# Altium PCB industrial_stepper_driver.PcbDoc
Units mm, origin at the board's own origin, x right, y up, seen from the top; angles counter-clockwise.
Board outline 32.8 x 86.9 mm, 4 copper layers (Top Layer, GND, POWER, Bottom Layer), stack 1.556 mm thick; 104 components, 68 nets, 352 pads, 72 vias.
Unrouted connection lines stored in the file: 161.
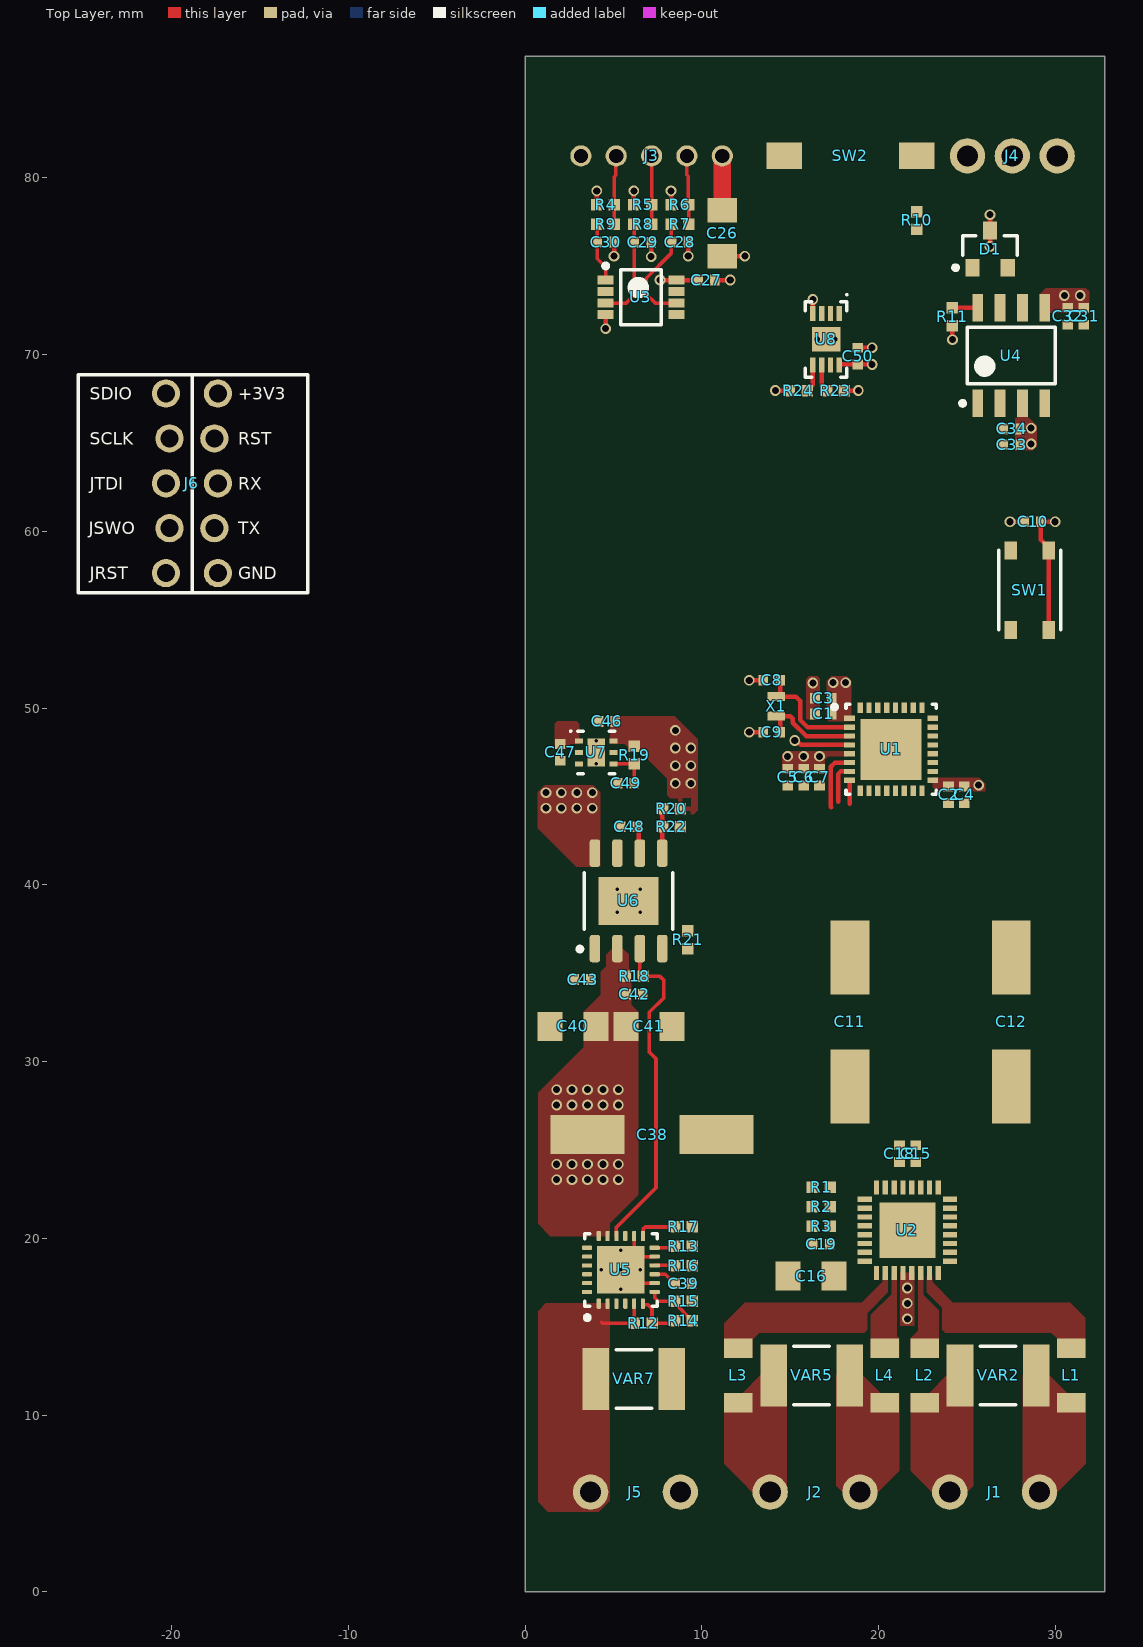
[diagram p0: Top Layer view]
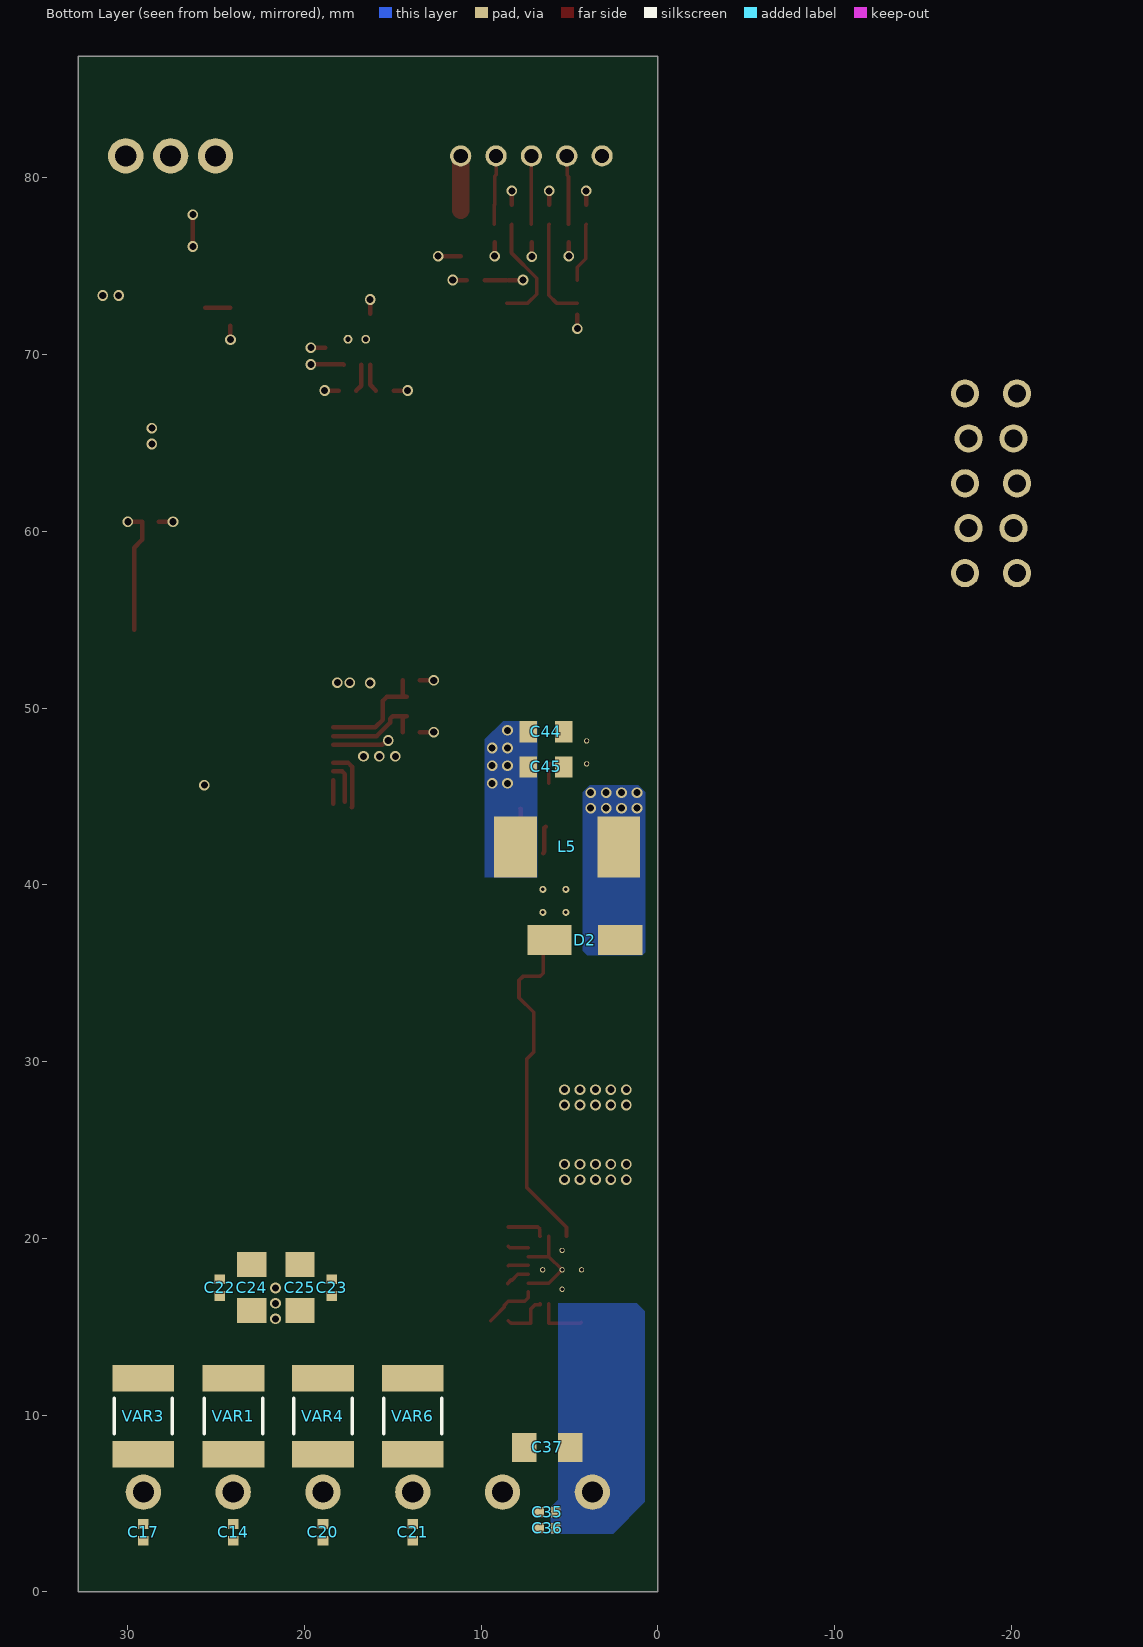
[diagram p1: Bottom Layer view, seen from below]
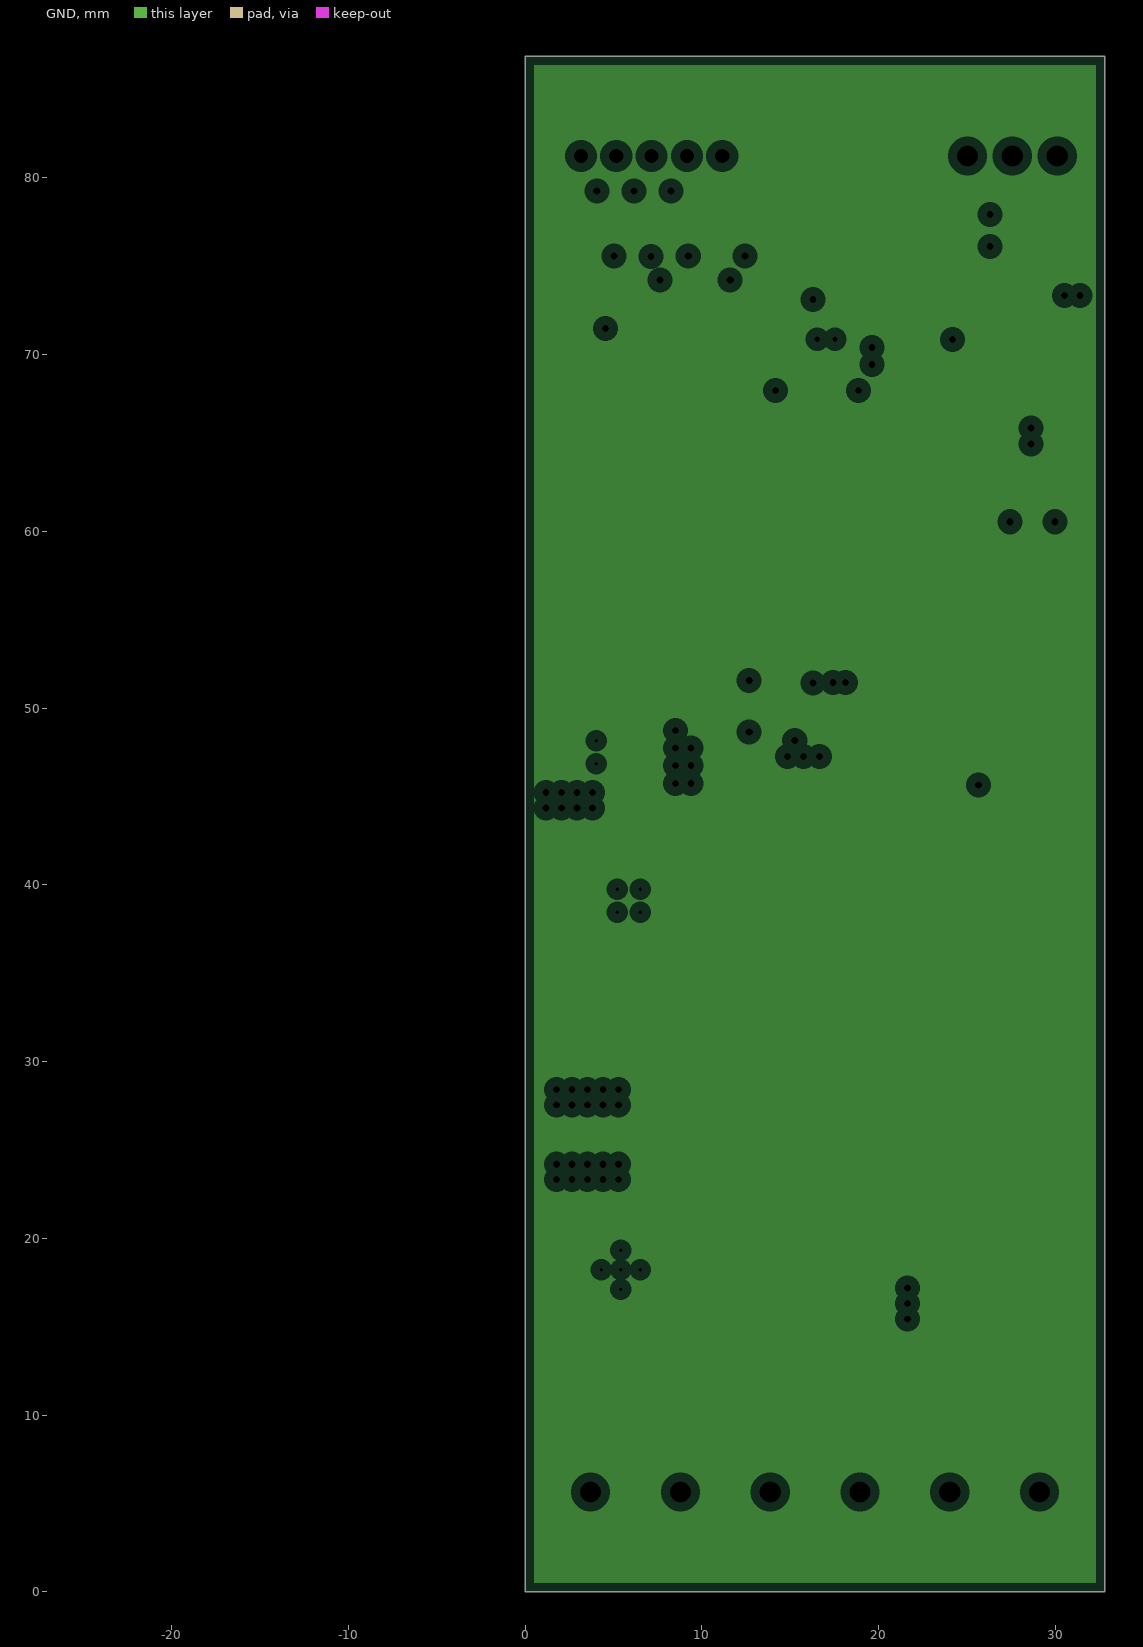
[diagram p2: GND, clearances drawn from the general rule]
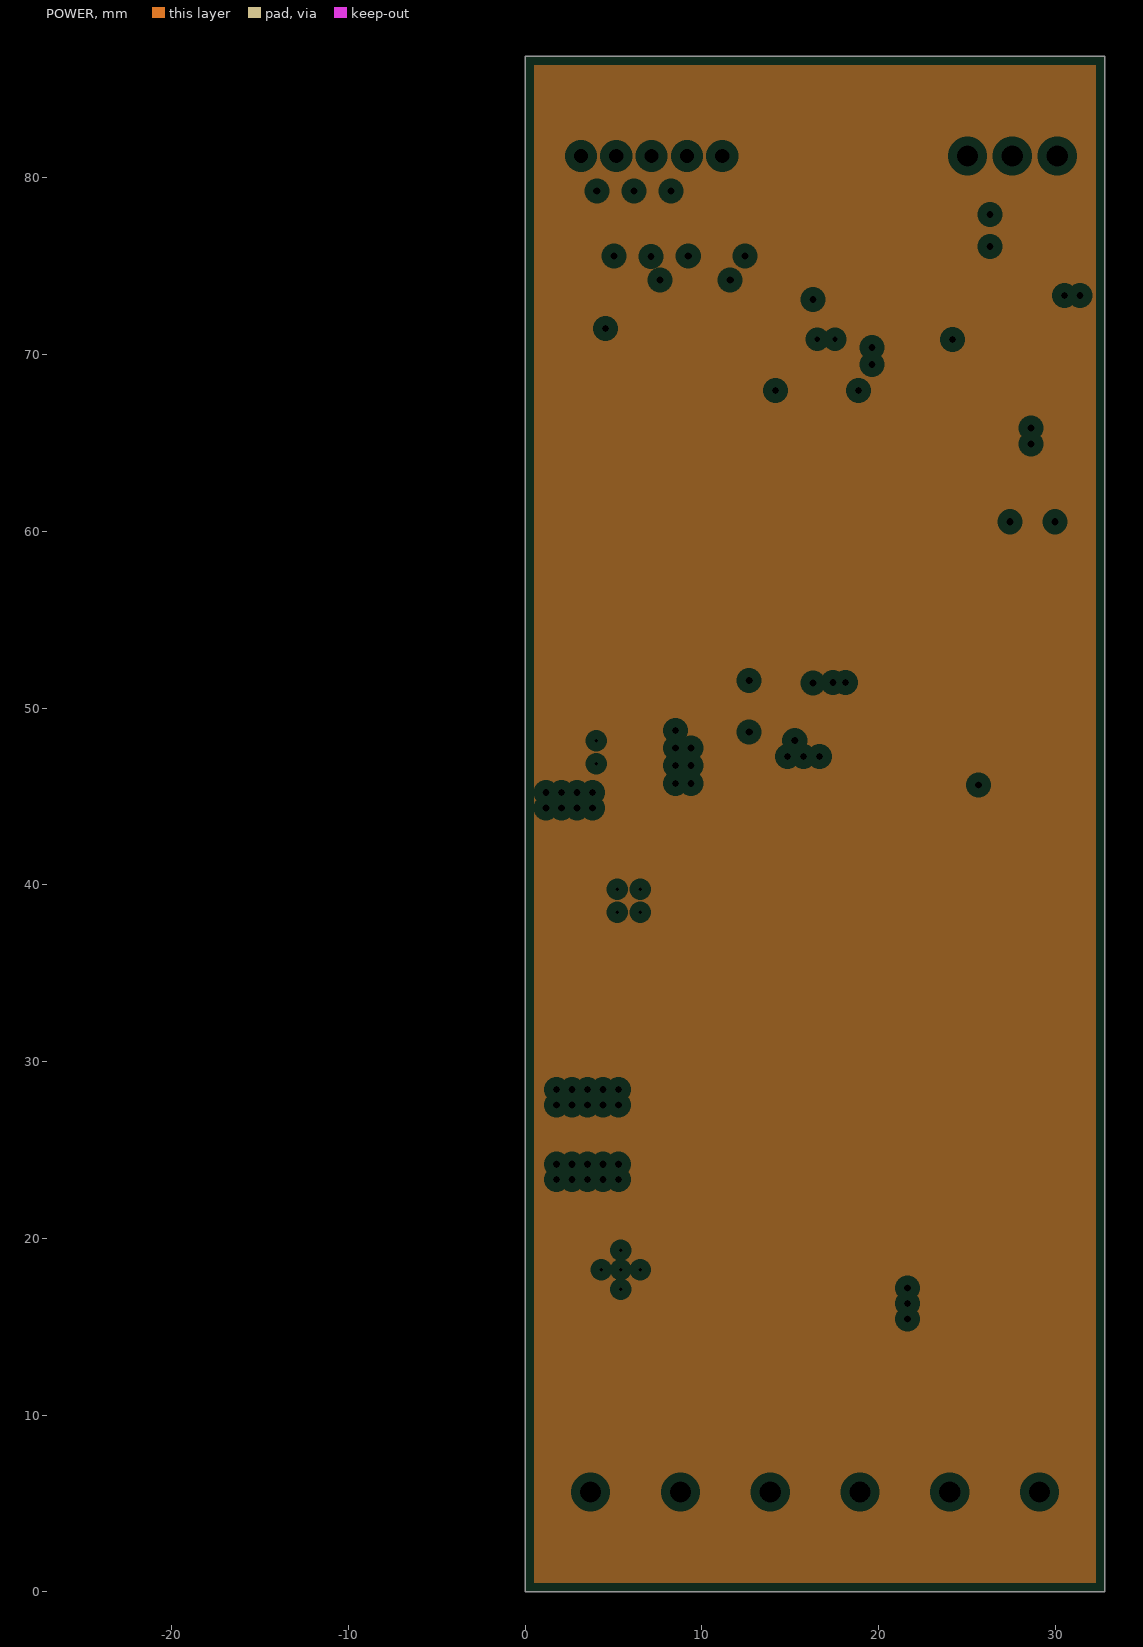
[diagram p3: POWER, clearances drawn from the general rule]

## Layer stack, top to bottom
Top Solder: solder mask 0.025, Solder Resist, Dk 3.5
Top Layer: signal copper 0.04
Dielectric 4: prepreg 0.069, PP-006, Dk 4.1
Dielectric 2: prepreg 0.069, PP-006, Dk 4.1
GND: plane copper 0.035
Dielectric 1: core 1.13, FR-4, Dk 4.8
POWER: plane copper 0.035
Dielectric 3: prepreg 0.069, PP-006, Dk 4.1
Dielectric 5: prepreg 0.069, PP-006, Dk 4.1
Bottom Layer: signal copper 0.04
Bottom Solder: solder mask 0.025, Solder Resist, Dk 3.5

## Board outline
0,0 32.8,0 32.8,86.9 0,86.9

## Design rules (kind name [scope] priority, off if disabled: settings)
Clearance [All] p1: gap=0.15 ignorepadtopadclearanceinfootprint=FALSE except(0.2: Fill-Fill Fill-Poly Fill-Region Poly-Poly Poly-Region Region-Region)
PlaneClearance [All] p1: clearance=0.508
PlaneConnect [All] p1: planeconnectstyle=Relief reliefexpansion=0.508 reliefentries=4 reliefconductorwidth=0.254 reliefairgap=0.254
PolygonConnect [All] p1: connectstyle=Relief reliefconductorwidth=0.254 reliefentries=4 polygonreliefangle="90 Angle" airgapwidth=0.254
RoutingVias [All] p1: holewidth=0.711 width=1.27 viastyle="Through Hole" minholewidth=0.711 minwidth=1.27 maxholewidth=0.711 maxwidth=1.27
SolderMaskExpansion [All] p1: expansion=0.102 istentingtop=FALSE
Width [All] p1: maxlimit=5 minlimit=0.125 preferedwidth=0.254
28 further rules are at their usual default settings.

## Classes and differential pairs
component class "06 POWER": C35 C36 C37 C38 C39 C40 C41 C42 C43 C44 C45 C46 C47 C48 C49 D2 J5 L5 R12 R13 R14 R15 R16 R17 R18 R19 R20 R21 R22 U5 U6 U7 VAR7
component class "05 COMMUNICATION": C31 C32 C33 C34 C50 D1 J4 R10 R11 R23 R24 SW2 U4 U8
component class "04 DRIVER": C11 C12 C14 C15 C16 C17 C18 C19 C20 C21 C22 C23 C24 C25 C26 C27 C28 C29 C30 J1 J2 J3 L1 L2 L3 L4 R1 R2 R3 R4 R5 R6 R7 R8 R9 U2 U3 VAR1 VAR2 VAR3 VAR4 VAR5 VAR6
component class "03 MCU": C1 C2 C3 C4 C5 C6 C7 C8 C9 C10 J6 SW1 U1 X1

## Components (designator, comment, footprint, x,y, rotation, side; value= is the part's Value field where it differs from the comment)
C1 "100nF/50V" CAPC1005X06M-0402 16.875,49.675 r0 top
C2 "100nF/50V" CAPC1005X06M-0402 23.95,45.1 r90 top
C3 "2.2uF/6.3V" CAPC1005X06M-0402 16.875,50.575 r0 top
C4 "2.2uF/6.3V" CAPC1005X06M-0402 24.85,45.1 r90 top
C5 "1uF/6.3V" CAPC1005X06M-0402 14.85,46.1 r90 top
C6 "22nF/50V" CAPC1005X06M-0402 15.75,46.1 r90 top
C7 "100nF/50V" CAPC1005X06M-0402 16.65,46.1 r90 top
C8 "22pF/50V" CAPC1005X06M-0402 13.95,51.575 r0 top
C9 "22pF/50V" CAPC1005X06M-0402 13.95,48.65 r0 top
C10 "100nF/50V" CAPC1005X06M-0402 28.704,60.55 r0 top
C11 "100uF/50V" A768KS107M1HLAE030 18.375,32.25 r90 top
C12 "100uF/50V" A768KS107M1HLAE030 27.5,32.25 r90 top
C14 "470pF/50V" CAPC1005X06M-0402 24.01,3.375 r90 bottom
C15 "2.2uF/6.3V" CAPC1005X06M-0402 22.1,24.8 r270 top
C16 "1uF/100V" CAPC2012X14M 16.175,17.875 r0 top
C17 "470pF/50V" CAPC1005X06M-0402 29.11,3.375 r270 bottom
C18 "100nF/50V" CAPC1005X06M-0402 21.175,24.8 r270 top
C19 "22nF/50V" CAPC1005X06M-0402 16.75,19.675 r0 top
C20 "470pF/50V" CAPC1005X06M-0402 18.94,3.375 r90 bottom
C21 "470pF/50V" CAPC1005X06M-0402 13.865,3.375 r270 bottom
C22 "100nF/50V" CAPC1005X06M-0402 24.775,17.225 r270 bottom
C23 "100nF/50V" CAPC1005X06M-0402 18.45,17.225 r270 bottom
C24 "1uF/100V" CAPC2012X14M 22.975,17.225 r270 bottom
C25 "1uF/100V" CAPC2012X14M 20.25,17.225 r270 bottom
C26 "1uF/100V" CAPC2012X14M 11.15,76.875 r90 top
C27 "100nF/50V" CAPC1005X06M-0402 10.25,74.225 r0 top
C28 "15pF/50V" CAPC1005X06M-0402 8.75,76.375 r180 top
C29 "15pF/50V" CAPC1005X06M-0402 6.65,76.35 r180 top
C30 "15pF/50V" CAPC1005X06M-0402 4.55,76.375 r180 top
C31 "100nF/50V" CAPC1005X06M-0402 31.6,72.175 r90 top
C32 "2.2uF/6.3V" CAPC1005X06M-0402 30.7,72.175 r90 top
C33 "100nF/50V" CAPC1005X06M-0402 27.525,64.9 r0 top
C34 "2.2uF/6.3V" CAPC1005X06M-0402 27.525,65.8 r0 top
C35 "22nF/50V" CAPC1005X06M-0402 6.25,4.5 r180 bottom
C36 "100nF/50V" CAPC1005X06M-0402 6.25,3.601 r180 bottom
C37 "1uF/100V" CAPC2012X14M 6.25,8.175 r180 bottom
C38 "100uF/50V" A768KS107M1HLAE030 7.175,25.875 r0 top
C39 "22nF/50V" CAPC1005X06M-0402 8.95,17.45 r180 top
C40 "4.7uF/50V" CAPC2012X14M 2.7,32 r0 top
C41 "4.7uF/50V" CAPC2012X14M 7,32 r180 top
C42 "100nF/50V" CAPC1005X06M-0402 6.175,33.825 r180 top
C43 "100nF/50V" CAPC1005X06M-0402 3.25,34.65 r0 top
C44 "47uF/6.3V" CAPC1608X10M-0603 6.325,48.675 r0 bottom
C45 "47uF/6.3V" CAPC1608X10M-0603 6.325,46.675 r0 bottom
C46 "1uF/6.3V" CAPC1005X06M-0402 4.625,49.25 r0 top
C47 "1uF/6.3V" CAPC1005X06M-0402 1.975,47.5 r90 top
C48 "22nF/50V" CAPC1005X06M-0402 5.875,43.3 r180 top
C49 "100nF/50V" CAPC1005X06M-0402 5.7,45.75 r0 top
C50 "100nF/50V" CAPC1005X06M-0402 18.825,69.925 r270 top
D1 "RESD1CANYT116" SOT100P240X115-3N 26.3,75.975 r90 top
D2 "B350A-13-F" SMA 4.125,36.875 r0 bottom
J1 "2POS 5.08MM" 282837-2 29.1,5.65 r180 top
J2 "2POS 5.08MM" 282837-2 18.94,5.65 r180 top
J3 "5POS 2MM" B5B-PH-K-S 7.15,81.25 r180 top locked
J4 "3POS 2.54MM" 282834-3 25.02,81.25 r0 top locked
J5 "2POS 5.08MM" 282837-2 8.78,5.65 r180 top locked
J6 "CONN_PROG" CONN_PROG -17.585,67.805 r270 top
L1 "50/100MHz" INDC3200X110-1206 30.9,12.25 r270 top
L2 "50/100MHz" INDC3200X110-1206 22.6,12.25 r270 top
L3 "50/100MHz" INDC3200X110-1206 12.05,12.25 r270 top
L4 "50/100MHz" INDC3200X110-1206 20.35,12.25 r270 top
L5 "5.6uH/5.3A" IHLP2525CZER5R6M8A 5.125,42.15 r0 bottom
R1 "100k/1%" RESC1005X04M-0402 16.75,22.9 r180 top
R2 "100k/1%" RESC1005X04M-0402 16.75,21.8 r180 top
R3 "100k/1%" RESC1005X04M-0402 16.75,20.7 r180 top
R4 "4.7k/1%" RESC1005X04M-0402 4.55,78.475 r180 top
R5 "4.7k/1%" RESC1005X04M-0402 6.65,78.475 r180 top
R6 "4.7k/1%" RESC1005X04M-0402 8.75,78.475 r180 top
R7 "1k/1%" RESC1005X04M-0402 8.75,77.375 r180 top
R8 "1k/1%" RESC1005X04M-0402 6.65,77.375 r180 top
R9 "1k/1%" RESC1005X04M-0402 4.55,77.375 r180 top
R10 "120/1%" RESC1005X04M-0402 22.15,77.6 r90 top
R11 "100k/1%" RESC1005X04M-0402 24.175,72.15 r90 top
R12 "866k/1%" RESC1005X04M-0402 6.675,15.2 r180 top
R13 "100k/1%" RESC1005X04M-0402 8.95,19.55 r180 top
R14 "78.7k/1%" RESC1005X04M-0402 8.95,15.35 r180 top
R15 "32.4k/1%" RESC1005X04M-0402 8.95,16.45 r180 top
R16 "3k/1%" RESC1005X04M-0402 8.95,18.45 r180 top
R17 "18.7k/1%" RESC1005X04M-0402 8.95,20.65 r180 top
R18 "100k/1%" RESC1005X04M-0402 6.175,34.825 r0 top
R19 "100k/1%" RESC1005X04M-0402 6.175,47.35 r90 top
R20 "100k/1%" RESC1005X04M-0402 8.275,44.325 r0 top
R21 "32.4k/1%" RESC1005X04M-0402 9.2,36.9 r270 top
R22 "17.4k/1%" RESC1005X04M-0402 8.275,43.3 r180 top
R23 "4.7k/1%" RESC1005X04M-0402 17.55,67.975 r0 top
R24 "4.7k/1%" RESC1005X04M-0402 15.45,67.975 r180 top
SW1 "Switch SPST-NO" "PTS815 SJM 250 SMTR LFS" 28.552,56.678 r90 top
SW2 "SDA01H1SBD" SDA01H1SB 18.4,81.25 r0 top locked
U1 "STM32L432KCU6" PQFN50P500X500X60_HS-33N 20.7,47.675 r0 top
U2 "TMC2240ATJ+" TQFN32-5mmx5mm 21.625,20.465 r270 top
U3 "74LVC3G17DP,125" TSOP65P400X110-8N 6.55,73.25 r0 top
U4 "TCAN1051VDRQ1" SOIC127P600X175-8N 27.5,69.95 r90 top
U5 "TPS16630RGET" PQFN50P400X400X100_HS-25N 5.412,18.225 r90 top
U6 "LMR14020SDDAR" SOIC127P600X170_HS-9N 5.85,39.1 r90 top
U7 "TLV75533PDRVR" SON65P200X80_HS-7N 4.025,47.5 r0 top
U8 "ATECC608A-MAHDA-S" SON50P200X60_HS-9N 17.025,70.875 r270 top
VAR1 "68V/600A" VARA4732X16N 24.01,9.95 r90 bottom
VAR2 "68V/600A" VARA4732X16N 26.75,12.25 r0 top
VAR3 "68V/600A" VARA4732X16N 29.11,9.95 r270 bottom
VAR4 "68V/600A" VARA4732X16N 18.94,9.95 r90 bottom
VAR5 "68V/600A" VARA4732X16N 16.2,12.25 r180 top
VAR6 "68V/600A" VARA4732X16N 13.865,9.95 r270 bottom
VAR7 "68V/600A" VARA4732X16N 6.15,12.05 r180 top
X1 "32.7680KHZ" 2-SMD 14.198,50.105 r90 top

## Footprints (in the part's own frame and the unit in brackets; to place one, negate y for a bottom-side part, rotate by r counter-clockwise, add the part's x,y. Pads: shape width x height; smd on the part's side, far side on the other; paste and mask are expansions set on the pad)
2-SMD [mm]
  rect 0.5x1 smd mask+0.1: 1(-0.55,0) 2(0.55,0)
  body extent -0.8,-0.5 0.8,0.5, height 0.51
282834-3 [mm]
  round 2 hole 1.2: 1(0,0) 2(2.54,0) 3(5.08,0)
  body extent -1.5,-3.25 6.58,3.25, height 10.01
282837-2 [mm]
  round 2 hole 1.2: 1(0,0) 2(5.08,0)
  body extent -2.53,-4.07 8.23,4.13, height 10.01
A768KS107M1HLAE030 [mm] "A768KS107M1HLAE030"
  rect 4.2x2.2 smd: 1(-3.65,0) 2(3.65,0)
  body extent -4.6,-4.25 4.6,4.25, height 12.52
B5B-PH-K-S [mm] "B5B-PH-K-S"
  round 1.2 hole 0.8: 1(-4,0) 2(-2,0) 3(0,0) 4(2,0) 5(4,0)
  body extent -5.95,-2.8 5.95,1.7, height 6.01
CAPC1005X06M-0402 [mm] "Chip Capacitor, 2-Leads, Body 1.00x0.50mm, IPC Low Density"
  rect 0.55x0.6 smd: 1(-0.475,0) 2(0.475,0)
  body extent -0.55,-0.3 0.55,0.3, height 0.6
CAPC1608X10M-0603 [mm] "Chip Capacitor, 2-Leads, Body 1.60x0.80mm, IPC Low Density"
  rect 1x1.2 smd: 1(-1,0) 2(1,0)
  body extent -0.9,-0.5 0.9,0.5, height 1
CAPC2012X14M [mm] "Chip Capacitor, 2-Leads, Body 2.00x1.25mm, IPC Low Density"
  rect 1.4x1.65 smd: 1(-1.3,0) 2(1.3,0)
  body extent -1.07,-0.7 1.07,0.7, height 1.4
CONN_PROG [mm]
  round 1.6 hole 1.02: 1(0,0.2) 2(2.54,0) 3(5.08,0.2) 4(7.62,0) 5(10.16,0.2) 6(0,-2.74) 7(2.54,-2.54) 8(5.08,-2.74) 9(7.62,-2.54) 10(10.16,-2.74)
  silkscreen extent -1,-1.25 11.25,-1.25
IHLP2525CZER5R6M8A [mil]
  rect 95x135 smd: 1(-114.98,0) 2(114.98,0)
  body extent -138,-128 138,128, height 118
INDC3200X110-1206 [mm]
  rect 1.1x1.6 smd: 1(-1.55,0) 2(1.55,0)
  body extent -1.6,-0.8 1.6,0.8, height 1.11
PQFN50P400X400X100_HS-25N [mm] "PQFN, 24-Leads, Body 4.00x4.00mm, Pitch 0.50mm, Thermal Pad 2.70x2.70mm, IPC Medium Density"
  rrect50% 0.58x0.24 smd mask+0.07: 1(-1.913,1.25) 2(-1.913,0.75) 3(-1.913,0.25) 4(-1.913,-0.25) 5(-1.913,-0.75) 6(-1.913,-1.25) 13(1.913,-1.25) 14(1.913,-0.75) 15(1.913,-0.25) 16(1.913,0.25) 17(1.913,0.75) 18(1.913,1.25)
  rrect50% 0.24x0.58 smd mask+0.07: 7(-1.25,-1.913) 8(-0.75,-1.913) 9(-0.25,-1.913) 10(0.25,-1.913) 11(0.75,-1.913) 12(1.25,-1.913) 19(1.25,1.913) 20(0.75,1.913) 21(0.25,1.913) 22(-0.25,1.913) 23(-0.75,1.913) 24(-1.25,1.913)
  round 0.3 hole 0.2 mask+0.102: 25(-1.1,0) 25(0,1.1) 25(0,0) 25(0,-1.1) 25(1.1,0)
  rect 2.7x2.7 smd paste-2539.97 mask+0.07: 25(0,0)
  silkscreen extent -2.82,-2.05 2.05,2.05, body extent -2.05,-2.05 2.05,2.05, height 1
PQFN50P500X500X60_HS-33N [mm] "PQFN, 32-Leads, Body 5.00x5.00mm, Pitch 0.50mm, Thermal Pad 3.50x3.50mm, IPC Medium Density"
  rect 0.6x0.3 smd mask+0.07: 1(-2.35,1.75) 2(-2.35,1.25) 3(-2.35,0.75) 4(-2.35,0.25) 5(-2.35,-0.25) 6(-2.35,-0.75) 7(-2.35,-1.25) 8(-2.35,-1.75) 17(2.35,-1.75) 18(2.35,-1.25) 19(2.35,-0.75) 20(2.35,-0.25) 21(2.35,0.25) 22(2.35,0.75) 23(2.35,1.25) 24(2.35,1.75)
  rect 0.3x0.6 smd mask+0.07: 9(-1.75,-2.35) 10(-1.25,-2.35) 11(-0.75,-2.35) 12(-0.25,-2.35) 13(0.25,-2.35) 14(0.75,-2.35) 15(1.25,-2.35) 16(1.75,-2.35) 25(1.75,2.35) 26(1.25,2.35) 27(0.75,2.35) 28(0.25,2.35) 29(-0.25,2.35) 30(-0.75,2.35) 31(-1.25,2.35) 32(-1.75,2.35)
  rect 3.45x3.45 smd mask+0.07: 33(0,0)
  silkscreen extent -3.32,-2.55 2.55,2.55, body extent -2.5,-2.5 2.5,2.5, height 0.61
"PTS815 SJM 250 SMTR LFS" [mm]
  rect 1x0.7 smd paste-2539.97: 1(-2.25,1.075) 2(2.25,1.075) 3(-2.25,-1.075) 4(2.25,-1.075)
  silkscreen extent -2.25,-1.75 2.25,1.75, body extent -2.25,-1.6 2.25,1.6, height 2.51
RESC1005X04M-0402 [mm] "Chip Resistor, 2-Leads, Body 1.00x0.50mm, IPC Low Density"
  rect 0.65x0.65 smd: 1(-0.5,0) 2(0.5,0)
  body extent -0.53,-0.27 0.53,0.28, height 0.4
SDA01H1SB [mm] "SDA01H1SB"
  rect 2x1.5 smd: 1(-3.75,0) 2(3.75,0)
  body extent -4.65,-2.26 4.65,2.26, height 5.25
SMA [mm]
  rect 2.5x1.7 smd: 1(-2,0) 2(2,0)
  body extent -2.5,-1.4 2.58,1.4, height 2.11
SOIC127P600X170_HS-9N [mm] "SOIC, 8-Leads, Body 4.90x3.90mm, Pitch 1.27mm, Thermal Pad 3.40x2.71mm, IPC Medium Density"
  rrect50% 1.55x0.6 smd mask+0.07: 1(-2.7,1.905) 2(-2.7,0.635) 3(-2.7,-0.635) 4(-2.7,-1.905) 5(2.7,-1.905) 6(2.7,-0.635) 7(2.7,0.635) 8(2.7,1.905)
  round 0.4 hole 0.2 mask+0.102: 9(-0.65,-0.65) 9(-0.65,0.65) 9(0.65,-0.65) 9(0.65,0.65)
  rect 2.71x3.4 smd mask+0.07: 9(0,0)
  silkscreen extent -2.85,-2.5 1.6,2.88, body extent -2,-2.5 2,2.5, height 1.7
SOIC127P600X175-8N [mm] "SOIC, 8-Leads, Body 4.91x3.90mm, Pitch 1.27mm, IPC Medium Density"
  rect 1.55x0.6 smd: 1(-2.7,1.905) 2(-2.7,0.635) 3(-2.7,-0.635) 4(-2.7,-1.905) 5(2.7,-1.905) 6(2.7,-0.635) 7(2.7,0.635) 8(2.7,1.905)
  silkscreen extent -2.82,-2.5 1.6,2.88, body extent -3,-2.45 3,2.45, height 1.75
SON50P200X60_HS-9N [mm] "SON, 8-Leads, Body 3.00x2.00mm, Pitch 0.50mm, Thermal Pad 1.50x0.68mm, IPC Medium Density"
  rect 0.85x0.3 smd: 1(-1.45,0.75) 2(-1.45,0.25) 3(-1.45,-0.25) 4(-1.45,-0.75) 5(1.45,-0.75) 6(1.45,-0.25) 7(1.45,0.25) 8(1.45,0.75)
  round 0.5 hole 0.3 mask+0.102: 9(0,0.5) 9(0,-0.5)
  rect 1.4x1.6 smd paste-0.1: 9(0,0)
  silkscreen extent -2.57,-1.17 2.15,1.23, body extent -1.53,-1.02 1.53,1.02, height 0.48
SON65P200X80_HS-7N [mm] "SON, 6-Leads, Body 2.00x2.00mm, Pitch 0.65mm, Thermal Pad 1.50x0.68mm, IPC Medium Density"
  rrect20% 0.45x0.3 smd mask+0.07: 1(-0.975,0.65) 2(-0.975,0) 3(-0.975,-0.65) 4(0.975,-0.65) 5(0.975,0) 6(0.975,0.65)
  round 0.3 hole 0.2 mask+0.102: 7(0,-0.65) 7(0,0.65)
  rect 1x1.6 smd paste-2539.97: 7(0,0)
  silkscreen extent -1.5,-1.2 1.05,1.25, body extent -1,-1 1,1, height 0.76
SOT100P240X115-3N [mm] "SOT23, 3-Leads, Body 2.90x2.40mm, Pitch 1.00mm, IPC Medium Density"
  rect 1x0.8 smd: 1(-1.05,1) 2(-1.05,-1) 3(1.05,0)
  silkscreen extent -1.17,-1.55 0.75,2.07, body extent -0.75,-1.55 0.75,1.55, height 1.15
TQFN32-5mmx5mm [mm]
  rect 0.8x0.3 smd mask+0.05: 1(-2.415,1.75) 2(-2.415,1.25) 3(-2.415,0.75) 4(-2.415,0.25) 5(-2.415,-0.25) 6(-2.415,-0.75) 7(-2.415,-1.25) 8(-2.415,-1.75) 17(2.415,-1.75) 18(2.415,-1.25) 19(2.415,-0.75) 20(2.415,-0.25) 21(2.415,0.25) 22(2.415,0.75) 23(2.415,1.25) 24(2.415,1.75)
  rect 0.3x0.8 smd mask+0.05: 9(-1.75,-2.415) 10(-1.25,-2.415) 11(-0.75,-2.415) 12(-0.25,-2.415) 13(0.25,-2.415) 14(0.75,-2.415) 15(1.25,-2.415) 16(1.75,-2.415) 25(1.75,2.415) 26(1.25,2.415) 27(0.75,2.415) 28(0.25,2.415) 29(-0.25,2.415) 30(-0.75,2.415) 31(-1.25,2.415) 32(-1.75,2.415)
  rect 3.15x3.15 smd mask+0.05: 33(0,0)
  body extent -2.5,-2.5 2.5,2.5, height 0.76
TSOP65P400X110-8N [mm] "TSOP, 8-Leads, Body 3.00x3.00mm, Pitch 0.65mm, IPC Medium Density"
  rect 0.9x0.5 smd: 1(-2,0.975) 2(-2,0.325) 3(-2,-0.325) 4(-2,-0.975) 5(2,-0.975) 6(2,-0.325) 7(2,0.325) 8(2,0.975)
  silkscreen extent -2.12,-1.55 1.15,1.9, body extent -2.05,-1.55 2.04,1.55, height 1.09
VARA4732X16N [mm] "VARISTOR, 2-Leads, Body 4.70x3.20mm, IPC Medium Density"
  rect 1.5x3.5 smd: 1(-2.15,0) 2(2.15,0)
  silkscreen extent -1,-1.65 1,1.65, body extent -2.55,-1.75 2.55,1.75, height 1.55

## Part data
C1 C2 C7 C10 C18 C22 C23 C27 C31 C33 C36 C42 C43 C49 C50: library part GRM155R71H104KE14D, "0.1 µF ±10% 50V Ceramic Capacitor X7R 0402 (1005 Metric)", ComponentLink1Description=Datasheet, ComponentLink1URL=https://search.murata.co.jp/Ceramy/image/img/A01X/G101/ENG/GRM155R60J475ME47-01.pdf, MPN=GRM155R71H104KE14D
C3 C4 C15 C32 C34: library part GRM155C80J225KE95D, "2.2 µF ±10% 6.3V Ceramic Capacitor X6S 0402 (1005 Metric)", ComponentLink1Description=Datasheet, ComponentLink1URL=https://search.murata.co.jp/Ceramy/image/img/A01X/G101/ENG/GRM155R60J475ME47-01.pdf, MPN=GRM155C80J225KE95D
C5 C46 C47: library part GRM155R70J105KA12J, "1 µF ±10% 6.3V Ceramic Capacitor X7R 0402 (1005 Metric)", ComponentLink1Description=Datasheet, ComponentLink1URL=https://search.murata.co.jp/Ceramy/image/img/A01X/G101/ENG/GRM155R60J475ME47-01.pdf, MPN=GRM155R70J105KA12J
C6 C19 C35 C39 C48: library part GRM155R71H223KA12D, "0.022 µF ±10% 50V Ceramic Capacitor X7R 0402 (1005 Metric)", ComponentLink1Description=Datasheet, ComponentLink1URL=https://search.murata.co.jp/Ceramy/image/img/A01X/G101/ENG/GRM155R60J475ME47-01.pdf, MPN=GRM155R71H223KA12D
C8 C9: library part GRM1555C1H220JA01D, "22 pF ±5% 50V Ceramic Capacitor C0G, NP0 0402 (1005 Metric)", ComponentLink1Description=Datasheet, ComponentLink1URL=https://search.murata.co.jp/Ceramy/image/img/A01X/G101/ENG/GRM155R60J475ME47-01.pdf, MPN=GRM1555C1H220JA01D
C11 C12 C38: library part A768KS107M1HLAE030, "100 µF 50 V Aluminum - Polymer Capacitors Radial, Can - SMD 30mOhm 2000 Hrs @ 125°C", ComponentLink1Description=Datasheet, ComponentLink1URL=https://connect.kemet.com:7667/gateway/IntelliData-ComponentDocumentation/1.0/download/datasheet/A768KS107M1HLAE030, MPN=A768KS107M1HLAE030
C14 C17 C20 C21: library part GRM155R71H471KA01D, "470 pF ±10% 50V Ceramic Capacitor X7R 0402 (1005 Metric)", ComponentLink1Description=Datasheet, ComponentLink1URL=https://search.murata.co.jp/Ceramy/image/img/A01X/G101/ENG/GRM155R60J475ME47-01.pdf, MPN=GRM155R71H471KA01D
C16 C24 C25 C26 C37: library part GRM21BC72A105KE01L, "1 µF ±10% 100V Ceramic Capacitor X7S 0805 (2012 Metric)", ComponentLink1Description=Datasheet, ComponentLink1URL=https://search.murata.co.jp/Ceramy/image/img/A01X/G101/ENG/GRM21BC72A105KE01-01.pdf, MPN=GRM21BC72A105KE01L
C28 C29 C30: library part GRM1555C1H150JA01D, "15 pF ±5% 50V Ceramic Capacitor C0G, NP0 0402 (1005 Metric)", ComponentLink1Description=Datasheet, ComponentLink1URL=https://search.murata.co.jp/Ceramy/image/img/A01X/G101/ENG/GRM155R60J475ME47-01.pdf, MPN=GRM1555C1H150JA01D
C40 C41: library part GRM21BR61H475KE51L, "4.7 µF ±10% 50V Ceramic Capacitor X5R 0805 (2012 Metric)", ComponentLink1Description=Datasheet, ComponentLink1URL=https://search.murata.co.jp/Ceramy/image/img/A01X/G101/ENG/GRM21BC72A105KE01-01.pdf, MPN=GRM21BR61H475KE51L
C44 C45: library part GRM188R60J476ME15D, "47 µF ±20% 6.3V Ceramic Capacitor X5R 0603 (1608 Metric)", ComponentLink1Description=Datasheet, ComponentLink1URL=https://search.murata.co.jp/Ceramy/image/img/A01X/G101/ENG/GRM188R60J476ME15-01.pdf, MPN=GRM188R60J476ME15D
D1: "44V Clamp 8A (8/20µs) Ipp Tvs Diode Surface Mount SOT-23", ComponentLink1Description=Datasheet, ComponentLink1URL=https://fscdn.rohm.com/en/products/databook/datasheet/discrete/diode/zener/resd1canyt116-e.pdf, MPN=RESD1CANYT116
D2: "Diode 50 V 3A Surface Mount SMA", ComponentLink1Description=Datasheet, ComponentLink1URL=https://www.diodes.com/assets/Datasheets/ds30891.pdf, MPN=B350A-13-F
J1 J2 J5: library part 282837-2, MPN=282834-3, ComponentLink1Description=Datasheet, ComponentLink1URL=https://www.te.com/commerce/DocumentDelivery/DDEController?Action=srchrtrv&DocNm=282834&DocType=Customer+Drawing&DocLang=English
J3: library part B5B-PH-K-S, "Connector Header Through Hole 5 position 0.079\" (2.00mm)", ComponentLink1Description=Datasheet, ComponentLink1URL=https://www.jst-mfg.com/product/pdf/eng/ePH.pdf, MPN=B5B-PH-K-S
J4: library part 282834-3, "3 Position Wire to Board Terminal Block Horizontal with Board 0.100\" (2.54mm) Through Hole", ComponentLink1Description=Datasheet, ComponentLink1URL=https://www.te.com/commerce/DocumentDelivery/DDEController?Action=srchrtrv&DocNm=282834&DocType=Customer+Drawing&DocLang=English, MPN=282834-3
L1 L2 L3 L4: library part 742792114, "50 Ohms 1 Signal Line Ferrite Bead 1206 (3216 Metric) 3A 25mOhm", ComponentLink1Description=Datasheet, ComponentLink1URL=https://www.we-online.com/katalog/datasheet/742792114.pdf, MPN=742792114
L5: library part IHLP2525CZER5R6M8A, "5.6 µH Shielded Molded Inductor 5.3 A 45.6mOhm Max Nonstandard", ComponentLink1Description=Datasheet, ComponentLink1URL=https://www.vishay.com/docs/34362/lp25cz8a.pdf, MPN=IHLP2525CZER5R6M8A
R1 R2 R3 R11 R13 R18 R19 R20: library part RC0402FR-07100KL, "100 kOhms ±1% 0.063W, 1/16W Chip Resistor 0402 (1005 Metric) Moisture Resistant Thick Film", ComponentLink1Description=Datasheet, ComponentLink1URL=https://www.yageo.com/upload/media/product/productsearch/datasheet/rchip/PYu-RC_Group_51_RoHS_L_12.pdf, MPN=RC0402FR-07100KL
R4 R5 R6 R23 R24: library part RC0402FR-074K7L, "4.7 kOhms ±1% 0.063W, 1/16W Chip Resistor 0402 (1005 Metric) Moisture Resistant Thick Film", ComponentLink1Description=Datasheet, ComponentLink1URL=https://www.yageo.com/upload/media/product/productsearch/datasheet/rchip/PYu-RC_Group_51_RoHS_L_12.pdf, MPN=RC0402FR-074K7L
R7 R8 R9: library part RC0402FR-071KL, "1 kOhms ±1% 0.063W, 1/16W Chip Resistor 0402 (1005 Metric) Moisture Resistant Thick Film", ComponentLink1Description=Datasheet, ComponentLink1URL=https://www.yageo.com/upload/media/product/productsearch/datasheet/rchip/PYu-RC_Group_51_RoHS_L_12.pdf, MPN=RC0402FR-071KL
R10: library part RC0402FR-07120RL, "120 Ohms ±1% 0.063W, 1/16W Chip Resistor 0402 (1005 Metric) Moisture Resistant Thick Film", ComponentLink1Description=Datasheet, ComponentLink1URL=https://www.yageo.com/upload/media/product/productsearch/datasheet/rchip/PYu-RC_Group_51_RoHS_L_12.pdf, MPN=RC0402FR-07120RL
R12: library part RC0402FR-07866KL, "866 kOhms ±1% 0.063W, 1/16W Chip Resistor 0402 (1005 Metric) Moisture Resistant Thick Film", ComponentLink1Description=Datasheet, ComponentLink1URL=https://www.yageo.com/upload/media/product/productsearch/datasheet/rchip/PYu-RC_Group_51_RoHS_L_12.pdf, MPN=RC0402FR-07866KL
R14: library part RC0402FR-0778K7L, "78.7 kOhms ±1% 0.063W, 1/16W Chip Resistor 0402 (1005 Metric) Moisture Resistant Thick Film", ComponentLink1Description=Datasheet, ComponentLink1URL=https://www.yageo.com/upload/media/product/productsearch/datasheet/rchip/PYu-RC_Group_51_RoHS_L_12.pdf, MPN=RC0402FR-0778K7L
R15 R21: library part RC0402FR-0732K4L, "32.4 kOhms ±1% 0.063W, 1/16W Chip Resistor 0402 (1005 Metric) Moisture Resistant Thick Film", MPN=RC0402FR-0718K7L, ComponentLink1Description=Datasheet, ComponentLink1URL=https://www.yageo.com/upload/media/product/productsearch/datasheet/rchip/PYu-RC_Group_51_RoHS_L_12.pdf
R16: library part RC0402FR-073KL, "3 kOhms ±1% 0.063W, 1/16W Chip Resistor 0402 (1005 Metric) Moisture Resistant Thick Film", ComponentLink1Description=Datasheet, ComponentLink1URL=https://www.yageo.com/upload/media/product/productsearch/datasheet/rchip/PYu-RC_Group_51_RoHS_L_12.pdf, MPN=RC0402FR-073KL
R17: library part RC0402FR-0718K7L, "18.7 kOhms ±1% 0.063W, 1/16W Chip Resistor 0402 (1005 Metric) Moisture Resistant Thick Film", ComponentLink1Description=Datasheet, ComponentLink1URL=https://www.yageo.com/upload/media/product/productsearch/datasheet/rchip/PYu-RC_Group_51_RoHS_L_12.pdf, MPN=RC0402FR-0718K7L
R22: library part RC0402FR-0717K4L, "17.4 kOhms ±1% 0.063W, 1/16W Chip Resistor 0402 (1005 Metric) Moisture Resistant Thick Film", ComponentLink1Description=Datasheet, ComponentLink1URL=https://www.yageo.com/upload/media/product/productsearch/datasheet/rchip/PYu-RC_Group_51_RoHS_L_12.pdf, MPN=RC0402FR-0717K4L
SW1: library part "PTS815 SJM 250 SMTR LFS", "Tactile Switch SPST-NO Top Actuated Surface Mount", ComponentLink1Description=Datasheet, ComponentLink1URL=https://www.ckswitches.com/media/2728/pts815.pdf, MPN="PTS815 SJM 250 SMTR LFS"
SW2: "Dip Switch SPST 1 Position Surface Mount Slide (Standard) Actuator 25mA 24VDC", ComponentLink1Description=Datasheet, ComponentLink1URL=https://www.ckswitches.com/media/1327/sda.pdf, MPN=SDA01H1SBD
U1: "ARM® Cortex®-M4 STM32L4 Microcontroller IC 32-Bit Single-Core 80MHz 256KB (256K x 8) FLASH 32-UFQFPN (5x5)", ComponentLink1Description=Datasheet, ComponentLink1URL=https://www.st.com/content/ccc/resource/technical/document/datasheet/24/01/9f/59/f0/83/47/fc/DM00257205.pdf/files/DM00257205.pdf/jcr:content/translations/en.DM00257205.pdf, MPN=STM32L432KCU6
U2: "Bipolar Motor Driver Power MOSFET SPI, UART 32-TQFN-EP (5x5)", ComponentLink1Description=Datasheet, ComponentLink1URL=http://mm.digikey.com/Volume0/opasdata/d220001/medias/docus/5344/TMC2240.pdf, MPN=TMC2240ATJ+
U3: "Buffer, Non-Inverting 3 Element 1 Bit per Element Push-Pull Output 8-TSSOP", ComponentLink1Description=Datasheet, ComponentLink1URL=https://assets.nexperia.com/documents/data-sheet/74LVC3G17.pdf, MPN=74LVC3G17DP,125
U4: "1/1 Transceiver Half CANbus 8-SOIC", ComponentLink1Description=Datasheet, ComponentLink1URL=https://www.ti.com/general/docs/suppproductinfo.tsp?distId=10&gotoUrl=https%3A%2F%2Fwww.ti.com%2Flit%2Fgpn%2Ftcan1051-q1, MPN=TCAN1051VDRQ1
U5: "Electronic Fuse Regulator 6A 24-VQFN (4x4)", ComponentLink1Description=Datasheet, ComponentLink1URL=https://www.ti.com/general/docs/suppproductinfo.tsp?distId=10&gotoUrl=https%3A%2F%2Fwww.ti.com%2Flit%2Fgpn%2Ftps1663, MPN=TPS16630RGET
U6: "Buck Switching Regulator IC Positive Adjustable 0.8V 1 Output 2A 8-PowerSOIC (0.154\", 3.90mm Width)", ComponentLink1Description=Datasheet, ComponentLink1URL=https://www.ti.com/general/docs/suppproductinfo.tsp?distId=10&gotoUrl=http%253A%252F%252Fwww.ti.com%252Flit%252Fgpn%252Flmr14020, MPN=LMR14020SDDAR
U7: "Linear Voltage Regulator IC Positive Fixed 1 Output 500mA 6-WSON (2x2)", ComponentLink1Description=Datasheet, ComponentLink1URL=https://www.ti.com/general/docs/suppproductinfo.tsp?distId=10&gotoUrl=https%3A%2F%2Fwww.ti.com%2Flit%2Fgpn%2Ftlv755p, MPN=TLV75533PDRVR
U8: "Authentication Chip 8-UDFN (2x3)", ComponentLink1Description=Datasheet, ComponentLink1URL=https://ww1.microchip.com/downloads/en/DeviceDoc/ATECC608A-CryptoAuthentication-Device-Summary-Data-Sheet-DS40001977B.pdf, MPN=ATECC608A-MAHDA-S
VAR1 VAR2 VAR3 VAR4 VAR5 VAR6 VAR7: library part ZV40K1812601NIR1, "68 V 600 A Varistor 1 Circuit Surface Mount, MLCV 1812 (4532 Metric)", ComponentLink1Description=Datasheet, ComponentLink1URL=https://www.bourns.com/docs/Product-Datasheets/ZV_series.pdf, MPN=ZV40K1812601NIR1
X1: library part ECS-.327-12.5-16-TR, "32.768 kHz ±20ppm Crystal 12.5pF 90 kOhms 2-SMD, No Lead", ComponentLink1Description=Datasheet, ComponentLink1URL=https://ecsxtal.com/store/pdf/ECX-16.pdf, MPN=ECS-.327-12.5-16-TR
J6: ComponentLink1Description=Datasheet, MPN=CONN_PROG

## Via types
v1: diameter 0.6, hole 0.4, Top Layer to Bottom Layer, tented both sides, 72 vias

## Nets (pads, with @x,y where several pads share a name; then routed paths per layer and width w, separated by ;. In a path a pad name is that pad's centre, name@x,y a point inside that pad or via, vN(x,y) a via of type N, cw(c..) or ccw(c..) an arc to the next point about the centre after c; other vN are vias at no path point)
+3V3: C1.2 C2.2 C3.2 C4.2 C5.2 C6.2 C7.2 C18.2 C31.2 C32.2 C47.2 C50.2 J6.1 R1.2 R2.2 R3.2 R23.2 R24.2 U1.1 U1.5 U1.17 U2.5 U4.5 U7.1 U8.8 | length 3.5
  Top Layer w0.254: v1(14.15,67.975) R24.2 ; U8.8 U8.8 17.798,69.45 C50.2 v1(19.625,69.45) ; R23.2 v1(18.85,67.975)
  other v1: 25.65,45.65 14.85,47.275 15.75,47.275 16.65,47.275 17.425,51.45 18.125,51.45 30.5,73.35 31.4,73.35
+5V: C26.2 C27.1 C33.2 C34.2 C43.1 C44.2 C45.2 C46.2 J3.1 L5.2 R4.2 R5.2 R6.2 R19.2 R20.2 U3.8 U4.3 U7.6 | length 7.5
  Top Layer w0.254: R4.2 v1(4.05,79.275) ; R5.2 v1(6.15,79.275) ; v1(7.625,74.225) U3.8@8.425,74.225 ; R6.2 v1(8.25,79.275) ; U3.8 C27.1
  Top Layer w1: C26.2 J3.1
  other v1: 8.5,45.75 9.375,45.75 8.5,46.75 9.375,46.75 8.5,47.75 9.375,47.75 8.5,48.75 28.625,64.95 28.625,65.85
BOOT: C43.2 U6.1
CANH: D1.1 J4.1 SW2.2 U4.7
CANL: D1.2 J4.2 R10.1 U4.6
DIAG0: R2.1 U1.18 U2.11
DIAG1: R3.1 U1.28 U2.12
DIRECTION: U1.15 U2.32
DRIVER_OUT1A: L1.1 U2.23
DRIVER_OUT1B: L3.1 U2.18
DRIVER_OUT2A: L2.1 U2.22
DRIVER_OUT2B: L4.1 U2.19
DRV_ENn: R1.1 U1.11 U2.9
EN: C49.2 R19.1 U7.4 | length 2.3
  Top Layer w0.2: U7.4 R19.1 C49.2
ENC_A: U2.8 U3.2
ENC_B: U2.7 U3.5
ENC_N: U2.6 U3.7
FB: R20.1 R22.2 U6.5 | length 2.5
  Top Layer w0.254: U6.5 7.765,41.81 7.765,44.315 R20.1
GND: C1.1 C2.1 C3.1 C4.1 C5.1 C6.1 C7.1 C8.1 C9.1 C10.1 C11.2 C12.2 C14.1 C15.1 C17.2 C18.1 C20.1 C21.2 C22.1 C23.1 C24.1 C25.1 C26.1 C27.2 C28.1 C29.1 C30.1 C31.1 C32.1 C33.1 C34.1 C35.1 C36.1 C37.1 C38.2 C39.1 C40.1 C41.1 C42.1 C44.1 C45.1 C46.1 C47.1 C48.2 C49.1 C50.1 D1.3 D2.2 J3.5 J4.3 J5.1 J6.5 R11.1 R15.1 R16.1 R17.1 R21.1 R22.1 SW1.1 SW1.2 U1.16 U1.32 U1.33 U2.4 U2.30 U2.33 U3.4 U4.2 U5.8 U5.11 U5.14 U5.25 U6.7 U6.9 U7.3 U7.7 U8.4 U8.9 VAR1.2 VAR3.1 VAR4.2 VAR6.1 VAR7.1 | length 17.5
  Top Layer w0.2: U5.14 U5.25@6.162,18.975 ; U5.8 6.162,17.475 5.412,18.225 U5.25@6.162,18.975 ; U5.11 U5.25@6.162,18.975
  Top Layer w0.254: v1(4.55,71.475) U3.4 ; v1(5.025,75.575) C30.1 ; v1(7.125,75.55) C29.1 ; v1(9.225,75.575) C28.1 ; C27.2@10.8,74.225 v1(11.6,74.225) ; C26.1 v1(12.425,75.575) ; v1(12.675,48.65) C9.1 ; v1(12.675,51.575) C8.1 ; U8.4 v1(16.275,73.125) ; C50.1 v1(19.625,70.4) ; v1(24.175,70.85) R11.1 ; v1(26.3,76.125) D1.3 v1(26.3,77.925) ; v1(27.429,60.55) C10.1
  other v1: 16.275,51.425
IN_ENC_A: J3.2 R6.1 R7.1 | length 3.9
  Top Layer w0.2: J3.2 9.15,80.175 9.225,80.1 9.225,78.5 R6.1 R7.1
IN_ENC_B: J3.3 R5.1 R8.1 | length 3.9
  Top Layer w0.2: R8.1 R5.1 J3.3
IN_ENC_N: J3.4 R4.1 R9.1 | length 3.9
  Top Layer w0.2: R9.1 R4.1 5.05,80.075 5.125,80.15 5.125,81.225 J3.4
INPUT_VCC: C35.2 C36.2 C37.2 J5.2 R12.2 R13.1 U5.1 U5.2 U5.5 VAR7.2 | length 3
  Top Layer w0.2: 4.325,15.25 4.375,15.2 R12.2 6.162,15.212 U5.5
JTAG_JTCK_SWCLK: J6.7 U1.24
JTAG_JTDI: J6.8 U1.25
JTAG_JTDO_SWO: J6.9 U1.26
JTAG_JTMS_SWDIO: J6.6 U1.23
JTAG_JTRST: J6.10 U1.27
NetC15_2: C15.2 U2.3
NetC16_1: C16.1 U2.16
NetC19_1: C19.1 U2.15
NetC19_2: C19.2 U2.14
NetC28_2: C28.2 R7.2 U3.6 | length 6.5
  Top Layer w0.2: R7.2 8.275,77.35 C28.2 8.275,75.759 6.85,74.334 6.85,73.425 7.35,72.925 U3.6
NetC29_2: C29.2 R8.2 U3.3 | length 5.8
  Top Layer w0.2: U3.3 5.725,72.925 6.175,73.375 C29.2 6.175,77.35 R8.2
NetC30_2: C30.2 R9.2 U3.1 | length 3.4
  Top Layer w0.2: R9.2 4.075,77.35 C30.2 4.075,75.425 4.55,74.95 U3.1
NetC39_2: C39.2 U5.9 | length 1.4
  Top Layer w0.2: U5.9 7.915,17.975 8.24,17.65 8.3,17.65 8.475,17.475 C39.2
NetR10_2: R10.2 SW2.1
NetR11_2: R11.2 U4.8 | length 1.4
  Top Layer w0.254: R11.2 U4.8
NetR12_1: R12.1 R14.2 U5.6 | length 2.8
  Top Layer w0.2: U5.6 6.662,16.259 6.682,16.239 6.965,16.239 7.175,16.03 R12.1 8.3,15.2 R14.2
NetR13_2: R13.2 U5.12 | length 1.2
  Top Layer w0.2: U5.12 8.375,19.475 R13.2
NetR14_1: R14.1 R15.2 U5.7 | length 3
  Top Layer w0.2: U5.7 7.325,16.65 7.525,16.45 R15.2 8.675,16.225 8.675,16.129 9.225,15.579 9.225,15.575 9.446,15.354 R14.1@9.45,15.354
NetR16_2: R16.2 U5.10 | length 1.1
  Top Layer w0.2: U5.10 8.425,18.475 R16.2
NetR17_2: R17.2 U1.6 U5.13 | length 5.7
  Top Layer w0.2: U5.13 6.666,20.141 6.666,20.533 6.783,20.65 R17.2
  Top Layer w0.254: 17.325,44.4 17.296,44.429 17.296,46.696 17.525,46.925 U1.6
NetR23_1: R23.1 U1.29 U8.6 | length 1.6
  Top Layer w0.254: U8.6 16.775,68.25 R23.1
NetR24_1: R24.1 U1.30 U8.5 | length 1.6
  Top Layer w0.254: R24.1 16.275,68.3 U8.5
NetU1_21: U1.21 U4.4
NetU1_22: U1.22 U4.1
OSC_IN: C8.2 U1.2 X1.2 | length 6.5
  Top Layer w0.254: X1.2 15.32,50.655 15.55,50.425 15.55,49.35 15.975,48.925 U1.2 ; X1.2@14.302,50.655 14.425,50.778 C8.2
OSC_OUT: C9.2 U1.3 X1.1 | length 5.7
  Top Layer w0.254: X1.1 14.425,49.555 14.997,49.555 15.146,49.406 15.146,49.183 15.904,48.425 U1.3 ; X1.1@14.302,49.555 14.425,49.432 C9.2
PGOOD_VIN: R18.2 U5.16 U6.3 | length 18.8
  Top Layer w0.2: U5.16 5.162,20.637 7.4,22.875 7.4,30.175 7.025,30.55 7.025,32.8 7.85,33.625 7.85,34.6 7.625,34.825 R18.2 6.485,35.015 U6.3
RSTn: C10.2 J6.2 SW1.3 SW1.4 U1.4 | length 10.3
  Top Layer w0.254: v1(15.25,48.175) 15.344,48.175 15.594,47.925 U1.4 ; SW1.3 SW1.4 29.627,59.078 29.179,59.527 C10.2 v1(29.979,60.55)
RT/SYNC: R21.2 U6.4
SLEEPn: U1.9 U2.25
SPI_CE: U1.10 U2.26
SPI_MISO: U1.12 U2.29
SPI_MOSI: U1.13 U2.28
SPI_SCK: U1.7 U2.27 | length 2.3
  Top Layer w0.254: 17.7,44.713 17.7,46.276 17.849,46.425 U1.7
SS: C48.1 U6.6 | length 1.6
  Top Layer w0.254: C48.1 6.418,43.232 6.418,41.867 U6.6
STEP: U1.14 U2.31
STEPPER_OUT1A: C14.2 J1.1 L1.2 VAR1.1 VAR2.2
STEPPER_OUT1B: C20.2 J2.2 L3.2 VAR4.1 VAR5.2
STEPPER_OUT2A: C17.1 J1.2 L2.2 VAR2.1 VAR3.2
STEPPER_OUT2B: C21.1 J2.1 L4.2 VAR5.1 VAR6.2
SW: D2.1 L5.1 U6.8
  other v1: 1.175,44.35 2.05,44.35 2.925,44.35 3.8,44.35 1.175,45.225 2.05,45.225 2.925,45.225 3.8,45.225
UART_EN: U1.8 U2.10 | length 1.3
  Top Layer w0.254: 18.35,44.6 U1.8
USART1_RX: J6.3 U1.19
USART1_TX: J6.4 U1.20
VCC: C11.1 C12.1 C16.2 C22.2 C23.2 C24.2 C25.2 C38.1 C40.2 C41.2 C42.2 R18.1 U2.17 U2.20 U2.21 U2.24 U5.17 U5.18 U6.2
  other v1: 21.625,15.45 21.625,16.325 21.625,17.2 1.775,23.325 2.65,23.325 3.525,23.325 4.4,23.325 5.275,23.325 1.775,24.2 2.65,24.2 3.525,24.2 4.4,24.2 5.275,24.2 1.775,27.55 2.65,27.55 3.525,27.55 4.4,27.55 5.275,27.55 1.775,28.425 2.65,28.425 3.525,28.425 4.4,28.425 5.275,28.425
pads on no net: U1.31 U2.1 U2.2 U2.13 U5.3 U5.4 U5.15 U5.19 U5.20 U5.21 U5.22 U5.23 U5.24 U7.2 U7.5 U8.1 U8.2 U8.3 U8.7

## Polygon pours and split planes (outlines as drawn)
+5V on Bottom Layer "NONET_L-01_P-001" (solid, pour order 0): 6.825,40.425 6.825,49.275 8.75,49.275 9.775,48.25 9.775,40.425
SW on Bottom Layer "NONET_L-01_P-001" (solid, pour order 4): 1.1,45.65 0.7,45.25 0.7,36.2 0.875,36.025 4,36.025 4.25,36.275 4.25,45.25 3.85,45.65
INPUT_VCC on Bottom Layer "NONET_L-01_P-001" (solid, pour order 5): 5.625,5.225 6.05,4.8 6.05,3.3 2.525,3.3 0.725,5.1 0.725,15.875 1.175,16.325 5.625,16.325
DRIVER_OUT2A on Top Layer "NONET_L-01_P-001" (solid, pour order 1): 22.375,18.05 22.225,17.9 22.225,14.775 21.8,14.35 21.8,13.25 23.4,13.25 23.4,15.95 22.525,16.825 22.525,17.9
DRIVER_OUT1A on Top Layer "NONET_L-01_P-001" (solid, pour order 24): 30.1,13.25 30.1,14.35 29.775,14.675 23.775,14.675 23.6,14.85 23.6,16.075 22.725,16.95 22.725,17.9 22.875,18.05 23.025,17.9 23.025,17.55 24.2,16.375 30.825,16.375 31.675,15.525 31.675,13.25
DRIVER_OUT1B on Top Layer "NONET_L-01_P-001" (solid, pour order 23): 12.85,13.25 12.85,14.275 13.25,14.675 19.175,14.675 19.35,14.85 19.35,15.775 20.525,16.95 20.525,17.9 20.375,18.05 20.225,17.9 20.225,17.55 19.05,16.375 12.425,16.375 11.25,15.2 11.25,13.25
DRIVER_OUT2B on Top Layer "NONET_L-01_P-001" (solid, pour order 22): 20.875,18.05 21.025,17.9 21.025,14.475 21.15,14.35 21.15,13.25 19.55,13.25 19.55,15.675 20.725,16.85 20.725,17.9
VCC on Top Layer "NONET_L-01_P-001" (solid, pour order 20): 21.225,18.05 21.225,15.075 22.025,15.075 22.025,18.05
STEPPER_OUT2B on Top Layer "NONET_L-01_P-001" (solid, pour order 19): 21.16,11.25 20.11,11.25 19.11,12.25 17.61,12.25 17.61,6 18.96,4.65 21.16,6.85
STEPPER_OUT2A on Top Layer "NONET_L-01_P-001" (solid, pour order 18): 21.8,11.25 22.85,11.25 23.85,12.25 25.35,12.25 25.35,6 24,4.65 21.8,6.85
STEPPER_OUT1A on Top Layer "NONET_L-01_P-001" (solid, pour order 17): 31.71,11.25 30.66,11.25 29.66,12.25 28.16,12.25 28.16,5.6 29.11,4.65 31.71,7.25 31.71,10.15
STEPPER_OUT1B on Top Layer "NONET_L-01_P-001" (solid, pour order 16): 11.25,11.25 12.3,11.25 13.3,12.25 14.8,12.25 14.8,5.6 13.85,4.65 11.25,7.25 11.25,10.15
+5V on Top Layer "NONET_L-01_P-001" (solid, pour order 15): 8.45,44 9.55,44 9.775,44.225 9.775,48.25 8.475,49.55 4.825,49.55 4.825,48.375 4.775,48.325 4.775,48 5.6,48 5.85,47.75 5.85,47.525 6.5,47.525 8.025,46 8.025,45.075 8.45,44.65
+5V on Top Layer "NONET_L-01_P-001" (solid, pour order 2): 27.725,66.375 27.825,66.475 27.825,67.25 28.425,67.25 28.425,66.5 28.95,65.975 28.95,64.825 28.725,64.6 27.725,64.6
+3V3 on Top Layer "NONET_L-01_P-001" (solid, pour order 14): 31.9,72.375 29.1,72.375 29.1,73.425 29.45,73.775 31.725,73.775 31.9,73.6
+3V3 on Top Layer "NONET_L-01_P-001" (solid, remove dead copper, pour order 3): 23.05,45.925 23.05,46.075 25.675,46.075 26.025,45.725 26.025,45.3 23.275,45.3 23.05,45.525
+3V3 on Top Layer "NONET_L-01_P-001" (solid, pour order 11): 17.075,51.55 17.325,51.8 18.2,51.8 18.45,51.55 18.45,49.275 17.175,49.275 17.075,49.375
GND on Top Layer "NONET_L-01_P-001" (solid, remove dead copper, pour order 12): 16.675,49.375 16.675,51.675 16.55,51.8 16.05,51.8 15.9,51.65 15.9,49.375
+3V3 on Top Layer "NONET_L-01_P-001" (solid, pour order 13): 18.35,47.575 14.725,47.575 14.55,47.4 14.55,46.3 16.95,46.3 16.95,47.075 17.15,47.275 18.35,47.275
+3V3 on Top Layer "NONET_L-01_P-001" (solid, pour order 6): 2.925,49.25 3.05,49.125 3.05,48 2.575,48 2.275,47.7 1.675,47.7 1.675,49.125 1.8,49.25
SW on Top Layer "NONET_L-01_P-001" (solid, pour order 10): 4.25,41.025 4.25,45.25 3.85,45.65 1.1,45.65 0.7,45.25 0.7,43.2 2.875,41.025
VCC on Top Layer "NONET_L-01_P-001" (solid, pour order 7): 4.575,35.4 4.275,35.1 4.275,33.8 3.3,32.825 3.3,30.825 0.725,28.25 0.725,20.825 1.413,20.137 4.762,20.137 4.775,20.15 4.775,20.85 6.4,22.475 6.4,32.825 6,33.225 6,35.15 5.85,35.3 5.85,36.075 5.525,36.4 4.925,36.4 4.575,36.05
INPUT_VCC on Top Layer "NONET_L-01_P-001" (solid, pour order 8): 1.275,4.55 0.725,5.1 0.725,15.875 1.175,16.325 4.775,16.325 4.775,5.175 4.15,4.55
no net on GND (split plane): 32.29,0.51 0.51,0.51 0.51,86.39 32.29,86.39
no net on POWER (split plane): 32.29,0.51 0.51,0.51 0.51,86.39 32.29,86.39

## Silkscreen, mask and mechanical layers (free items; w line width, h text height)
Top Overlay:
  lines w0.2: -25.3,56.525 -12.3,56.525 -12.3,68.875 -25.3,68.875 -25.3,56.525
  text "SDIO" at -24.647,67.195 h1.2
  text "+3V3" at -16.237,67.195 h1.2
  text "SCLK" at -24.647,64.655 h1.2
  text "RST" at -16.237,64.655 h1.2
  text "JTDI" at -24.647,62.115 h1.2
  text "RX" at -16.237,62.115 h1.2
  text "JSWO" at -24.685,59.575 h1.2
  text "TX" at -16.237,59.575 h1.2
  text "JRST" at -24.647,57.035 h1.2
  text "GND" at -16.237,57.035 h1.2
Notes:
  circle w0.05: c18.94,81.25 r0.65
  circle w0.05: c24.02,5.65 r0.65
  circle w0.05: c29.1,5.65 r0.65
  circle w0.05: c18.94,5.65 r0.65
  circle w0.05: c13.86,5.65 r0.65
  circle w0.05: c8.78,5.65 r0.65
  circle w0.05: c3.7,5.65 r0.65
  circle w0.05: c3.7,81.25 r0.65
  circle w0.05: c8.78,81.25 r0.65
  circle w0.05: c13.86,81.25 r0.65
  circle w0.05: c29.1,81.25 r0.65
  circle w0.05: c24.02,81.25 r0.65
  lines w0.2: 1.16,3.11 1.16,5.65 1.16,8.19 ; 1.16,78.71 1.16,81.25 1.16,83.79 ; 6.24,3.11 6.24,5.65 6.24,8.19 ; 6.24,78.71 6.24,81.25 6.24,83.79 ; 11.32,3.11 11.32,5.65 11.32,8.19 ; 11.32,78.71 11.32,81.25 11.32,83.79 ; 16.4,3.11 16.4,5.65 16.4,8.19 ; 16.4,78.71 16.4,81.25 16.4,83.79 ; 21.48,3.11 21.48,5.65 21.48,8.19 ; 21.48,78.71 21.48,81.25 21.48,83.79 ; 26.56,3.11 26.56,5.65 26.56,8.19 ; 26.56,78.71 26.56,81.25 26.56,83.79 ; 31.64,3.11 31.64,5.65 31.64,8.19 ; 31.64,78.71 31.64,81.25 31.64,83.79
  text "ENCODER" at 1.475,75.047 h2
  text "POWER" at 2.7,10.922 h2
  text "STEPPER" at 15.075,10.708 h3
Board:
  lines w0.2: 0,0 0,86.9 32.8,86.9 32.8,0